# Altium PCB MOTHERBOARD.PcbDoc (part 2 of 3)
Units mil, origin at the board's own origin, x right, y up, seen from the top; angles counter-clockwise.
Board outline 7367.75 x 3037.04 mil, 4 copper layers (Top Layer, Top, Mid-Layer 1, Mid-Layer 2, Bottom Layer, Bottom), stack 18.2 mil thick; 247 components, 239 nets, 1097 pads, 323 vias.
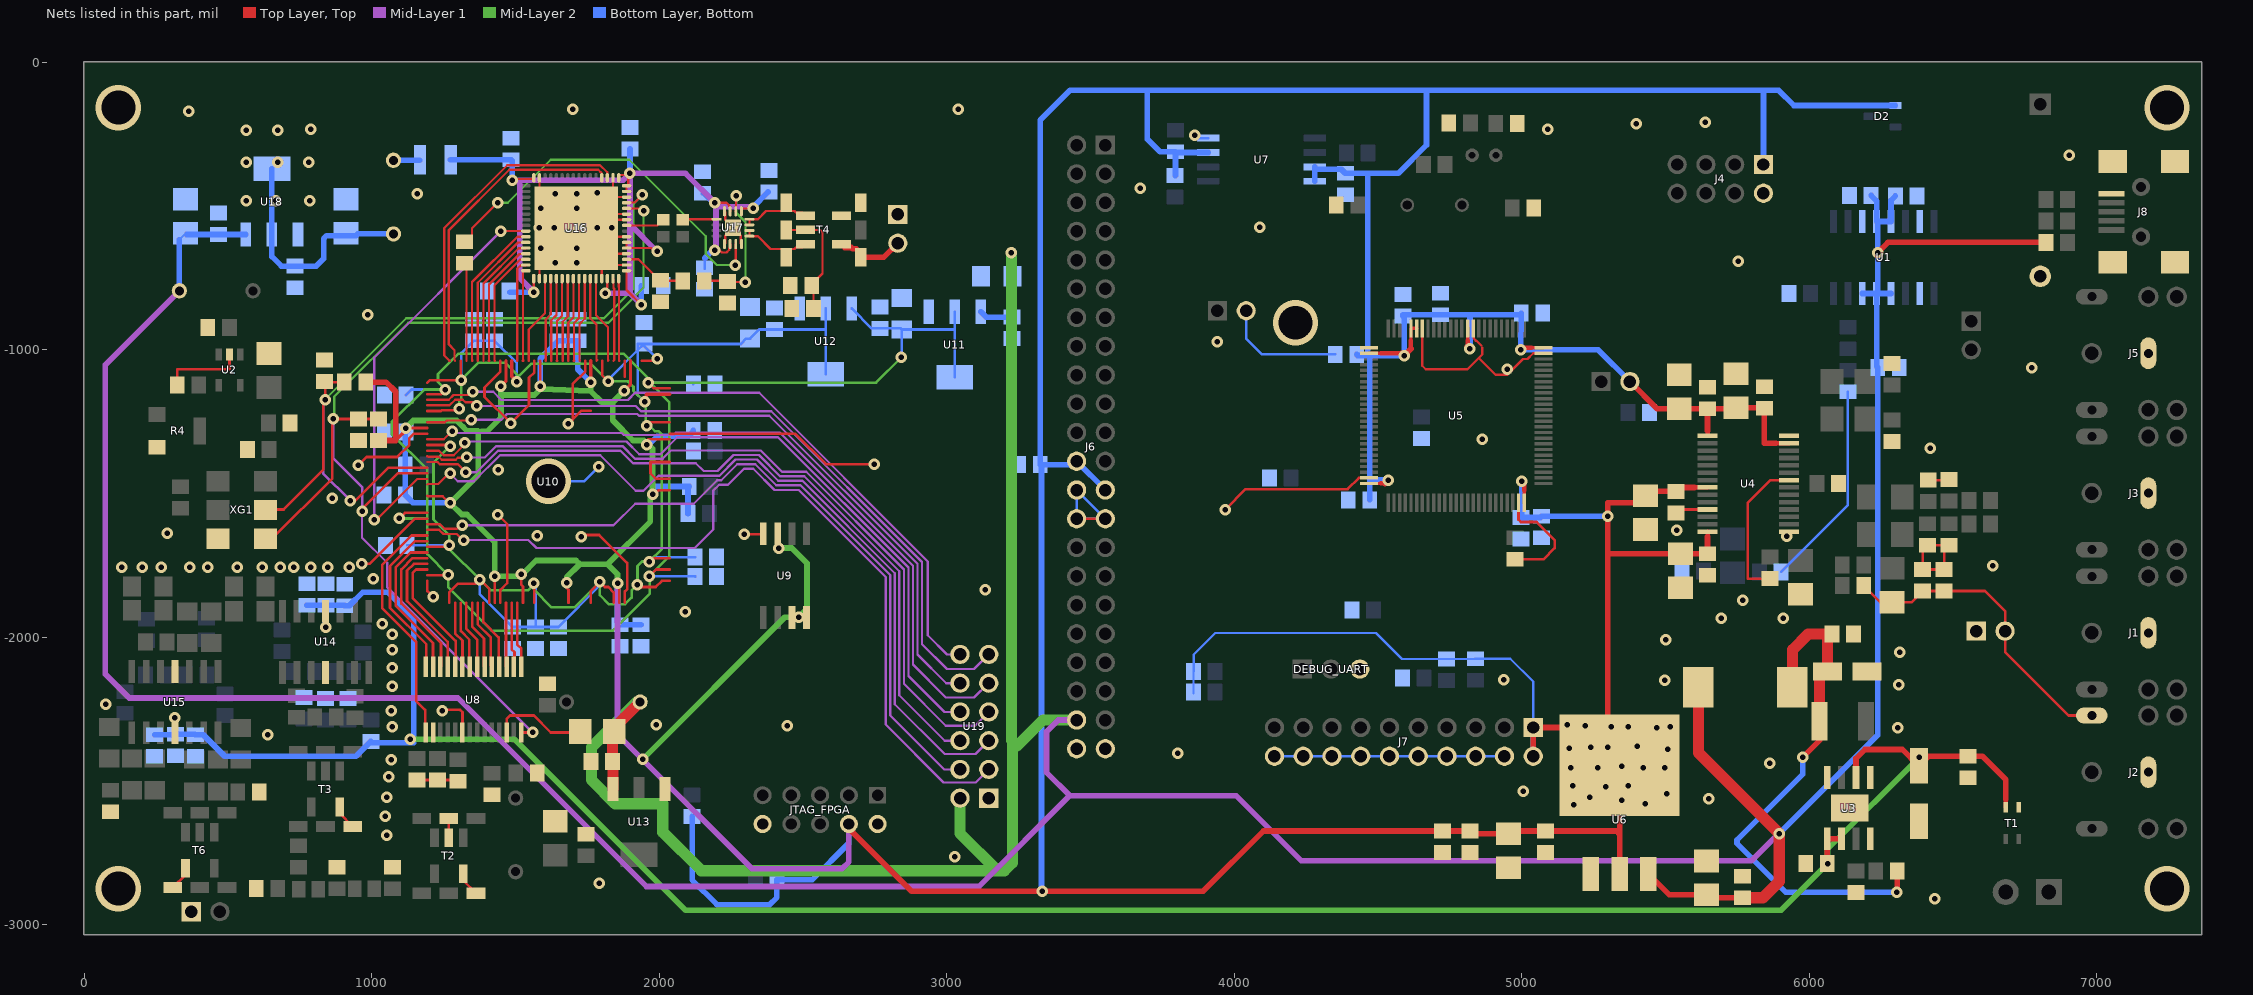
[diagram p4: the nets of this part, all layers, seen from the top]

## Part data
13.8V: library part JX2, "JX2"
B1: library part BR1632A/FA, "BR1632A/FA"
BOOT0 MIС_IN2 PTT_IN SPEAKER: library part 51022-0200, "51022-0200"
C1: library part CAPAE_6.6x6.6h5.4, "CAPAE_6.6x6.6h5.4"
C2 C8 C18 C20 C22 C24 C25 C26 C29 C32 C33 C34 C35 C54 C60: library part CAPAE_4.3x4.3h5.4, "CAPAE_4.3x4.3h5.4"
C3 C4 C5 C6 C7 C9 C10 C11 C12 C13 C14 C15 C16 C17 C19 C21 C23 C27 C28 C30 C31 C36 C37 C38 C39 C40 C41 C42 C43 C44 C45 C46 C47 C48 C49 C50 C51 C52 C53 C55 C56 C57 C58 C59 C61 C62 C63 C65 C67 C69 C70 C71 C72 C73 C74 C75 C76 C77 C78 C79 C81 C82 C83 C84 C86 C87 C88 C89 C90 C91 C92 C93 C94 C95 C96 C97 C98 C99 C100 C101 C104 C107 C123: library part CAP_0805, "CAP_0805"
C64 C66 C68: library part C0805, "C0805"
C80 C85: library part EEEFC_sizeB, "EEEFC_sizeB"
C102 C103 C105 C106 C108 C109 C110 C111: library part CAP_1206, "CAP_1206"
C125: library part EEEFC_sizeB
DEBUG_UART: library part 51022-0300, "51022-0300"
J1 J2 J3 J5: library part SJ1-3523N, "SJ1-3523N"
J4: library part 90131-0124, "90131-0124"
J6: library part 90131-0142, "90131-0142"
J7: library part 90131-0130, "90131-0130"
J8: library part 2-1734035-3, "2-1734035-3"
J9 J10: library part 644456-2, "644456-2"
JTAG_FPGA: library part IDC10, "IDC10"
L1: library part IND_1812, "IND_1812"
L2 L4: library part IND_0805, "IND_0805"
L3 L5 L6: library part IND_FERRITE_BEAD, "Ferrite bead on conductor"
L8: "Ferrite bead on conductor"
L37: library part IND_FERRITE_CORE, "Inductor"
R1 R2 R3 R5 R6 R7 R8 R9 R10 R11 R12 R13 R14 R15 R16 R17 R18 R19 R20 R21 R22 R23 R24 R25 R26 R27 R28 R29 R30 R31 R32 R33 R34 R35 R36 R37 R38 R39 R40 R41 R42 R43 R47 R48 R49 R50 R51 R53 R54 R56 R57 R58 R59 R60 R61 R64 R65: library part RES_0805, "RES_0805"
R4: library part EVM1DSX30B, "EVM1DSX30B"
R52 R55 R62 R63: library part RES_1206, "RES_1206"
T1: library part TRANSF_ICORE, "Transformer"
T2 T3: library part TRANSF_ACORE2, "Transformer"
T4: "Transformer"
T6: library part TRANSF_ACORE, "Transformer"
U11 U12: library part AMS1117, "AMS1117"
U13 U18: library part LT1117CST-3.3, "LT1117CST-3.3"
U17: library part CMP-0359-03855-2, "Single Channel, Low Noise, Low Distortion Differential ADC Driver for 300 MHz IF, 1800 MHz Typical GBW, 4500 V/us Typical SR, 2.85 to 3.5 V, 16-Pin QFN (UD-16), Industrial, Pb-Free", Linear Technology Part Number=LTC6400-20, Manufacturer="Linear Technology", Channels (#)=1, Code_JEDEC=MO-220, ComponentLink1Description="Manufacturer URL", ComponentLink1URL=http://www.linear.com/, ComponentLink2Description=Datasheet, ComponentLink2URL=http://cds.linear.com/docs/en/datasheet/640020f.pdf, ComponentLink3Description="Package Specification", ComponentLink3URL=http://cds.linear.com/docs/en/packaging/QFN_16_05-08-1691.pdf, GBW (MHz) Typical=1800, Is (mA) Typical=90, Mounting Technology="Surface Mount", PackageDescription="16-Lead Plastic QFN, Body 3.00 x 3.00 mm, Pitch 0.5 mm", PackageReference=LT-UD-16, PartNumber=LTC6400IUD-20#PBF, RevisionNote="URLs updated", RoHS=Pb-Free, SR (V/us) Typical=4500, Type=DIFF, Vos (mV) Typical=2, Vs Max (V)=3.5, Vs Min (V)=2.85
U19: "90131-0130"
XG1: library part NV7050SA, "NV7050SA"
Y1: library part R26-32.768, "R26-32.768"
Y2: library part ECS-200-20-1, "ECS-200-20-1"

## Via types
v1: diameter 40, hole 19.12, Top Layer, Top to Bottom Layer, Bottom, tented both sides, 262 vias
v2: diameter 40, hole 19.13, Top Layer, Top to Bottom Layer, Bottom, tented both sides, 51 vias
v3: diameter 157.48, hole 118.11, Top Layer, Top to Bottom Layer, Bottom, 6 vias
v4: diameter 40, hole 19.12, Top Layer, Top to Bottom Layer, Bottom, 3 vias
v5: diameter 19.68, hole 7.87, Top Layer, Top to Bottom Layer, Bottom, tented both sides, 1 vias

## Nets (pads, with @x,y where several pads share a name; then routed paths per layer and width w, separated by ;. In a path a pad name is that pad's centre, name@x,y a point inside that pad or via, vN(x,y) a via of type N, cw(c..) or ccw(c..) an arc to the next point about the centre after c; other vN are vias at no path point)
5V: C2.1 C6.2 L1.2 L37.2 R2.2 | length 1857.3
  Top Layer, Top w19.68: v1(5976.38,-2417.32) 6035.43,-2358.27 L1.2@6035.43,-2291.34 ; C2.1@6035.43,-2145.67 C2.1@6062.99,-2118.11 ; C6.2@6062.99,-2003.94 C6.2@6078.74,-1988.19 ; v1(6303.58,-2886.63) 6305.49,-2884.72 R2.2@6305.49,-2812.04
  Top Layer, Top w39.37: L37.2@5940.94,-2173.23 5940.94,-2043.31 5996.06,-1988.19 C6.2@6078.74,-1988.19 ; L1.2@6035.43,-2291.34 C2.1@6035.43,-2145.67 ; C2.1@6062.99,-2118.11 C6.2@6062.99,-2003.94
  Bottom Layer, Bottom w19.68: v1(5976.38,-2417.32) 5976.38,-2476.38 5748.03,-2704.72 5748.03,-2716.54 5917.32,-2885.83 6302.78,-2885.83 v1(6303.58,-2886.63)
+1V2: C62.1 C68.1 C69.1 C72.1 C74.1 C82.1 C87.1 C91.1 C95.1 C98.1 U10.1 U10.5 U10.29 U10.34 U10.37 U10.38 U10.45 U10.61 U10.70 U10.73 U10.78 U10.84 U10.102 U10.109 U10.116 U10.124 U10.134 U10.138 U12.2 U12.4 | length 7334.4
  Top Layer, Top w9.06: U10.102@1192.91,-1685.04 1263.75,-1685.04 v1(1268.65,-1680.14) ; U10.84@1192.91,-1330.71 1267.72,-1330.71 v1(1271.65,-1334.64) ; U10.78@1192.91,-1212.6 1239.91,-1212.6 1243.25,-1209.25 1298.62,-1209.25 v1(1303.15,-1204.72) ; U10.73@1192.91,-1114.17 1201.7,-1105.39 1310.74,-1105.39 v1(1311.32,-1105.97) 1309.06,-1103.71 U10.70@1309.06,-1037.4 ; U10.109@1269.69,-1879.92 1269.69,-1842.27 1297.91,-1814.04 1360.19,-1814.04 v1(1375.57,-1798.67) 1407.48,-1830.58 U10.116@1407.48,-1879.92 ; v1(1562.99,-1811.02) 1564.96,-1812.99 U10.124@1564.96,-1879.92 ; U10.134@1761.81,-1879.92 1761.81,-1837.85 v1(1792.49,-1807.18) 1810.01,-1824.69 1822.18,-1824.69 1840.55,-1843.07 U10.138@1840.55,-1879.92 ; U10.45@1801.18,-1037.4 1801.18,-1088.33 v1(1821.47,-1108.62) ; v1(1923.74,-1816.34) 1932.09,-1824.69 1987.19,-1824.69 2008.73,-1803.15 U10.1@2035.43,-1803.15 ; U10.38@1938.98,-1037.4 1986.22,-1037.4 v1(1992.13,-1031.5) ; v1(1956.69,-1263.78) 1956.69,-1257.27 1961.99,-1251.97 U10.29@2035.43,-1251.97 ; v1(1964.57,-1736.22) 1976.38,-1724.41 U10.5@2035.43,-1724.41
  Top Layer, Top w11.81: U10.61@1486.22,-1037.4 1486.22,-1092.52 v1(1503.94,-1110.24) ; v1(1948.82,-1181.1) 1954.21,-1175.71 1954.21,-1155.07 1955.73,-1153.54 U10.34@2035.43,-1153.54
  Mid-Layer 2 w9.06: v1(1271.65,-1334.64) 1214.1,-1392.19 1214.1,-1589.91 1268.65,-1644.46 v1(1268.65,-1680.14) 1268.65,-1691.75 v1(1375.57,-1798.67) 1413.54,-1836.65 1542.16,-1836.65 v1@1562.99,-1815.81 ; v1(1303.15,-1204.72) 1303.15,-1176.4 1311.32,-1168.22 v1(1311.32,-1105.97) 1311.32,-1103.46 1369.84,-1044.94 1464.45,-1044.94 1505.42,-1085.9 v1@1505.42,-1097.25 ; v1(1503.94,-1110.24) 1505.42,-1108.76 v1@1505.42,-1097.25 ; v1(1562.99,-1811.02) v1@1562.99,-1815.81 ; v1@1505.42,-1097.25 1553.97,-1048.7 1761.55,-1048.7 v1(1821.47,-1108.62) 1888.15,-1108.62 1889.23,-1109.7 1891,-1109.7 1909.98,-1128.68 1909.98,-1142.27 1952.75,-1185.04 1952.75,-1259.84 v1(1956.69,-1263.78) 1965.06,-1263.78 1983.79,-1282.5 1996.26,-1282.5 2008.46,-1294.7 2008.46,-1692.32 v1(1964.57,-1736.22) 1964.26,-1735.91 1939.4,-1735.91 1923.74,-1751.57 v1(1923.74,-1816.34) 1903.16,-1836.93 1903.16,-1861.56 1880.7,-1884.02 1823.68,-1884.02 1792.49,-1852.83 v1(1792.49,-1807.18) 1704.16,-1895.5 1625.37,-1895.5 1562.99,-1833.13 v1@1562.99,-1815.81
  Bottom Layer, Bottom w9.06: C87.1@1122.22,-1680.09 1268.6,-1680.09 v1(1268.65,-1680.14) ; v1(1311.32,-1105.97) 1311.32,-1010.62 C82.1@1353.48,-968.46 C74.1@1426.82,-968.46 1503.94,-1045.57 v1(1503.94,-1110.24) ; v1(1375.57,-1798.67) 1375.57,-1850.06 C91.1@1489.42,-1963.92 C95.1@1569.56,-1963.92 ; v1(1562.99,-1811.02) 1569.56,-1817.59 C95.1@1569.56,-1963.92 ; v1(1792.49,-1807.18) 1792.49,-1819.85 C98.1@1648.42,-1963.92 C95.1@1569.56,-1963.92 ; v1(1821.47,-1108.62) 1821.47,-1104.32 C72.1@1924.65,-1001.13 ; v1(1948.82,-1181.1) 1924.65,-1156.94 C72.1@1924.65,-1001.13 ; v1(1964.57,-1736.22) 1979.73,-1721.06 C62.1@2124.05,-1721.06 ; v1(1992.13,-1031.5) 1982.37,-1021.74 C72.1@1943.21,-982.58 ; U12.4@2578.74,-1084.44 2578.74,-929.11 ; U12.2@2578.74,-856.1 2578.74,-929.11 ; C72.1@1924.65,-1001.13 C72.1@1943.21,-982.58 ; C72.1@1924.65,-1001.13 1924.65,-979.6 1940.23,-979.6 C72.1@1943.21,-982.58 ; C72.1@1943.21,-982.58 C72.1@1946.19,-979.6 2283.06,-979.6 2302.03,-960.63 C68.1@2314.96,-960.63 2346.48,-929.11 C69.1@2400.72,-929.11 2578.74,-929.11
+2V5: C61.1 C66.1 C67.1 C73.1 C84.1 U10.3 U10.35 U10.75 U10.96 U10.107 U11.2 U11.4 U12.3 | length 5983.5
  Top Layer, Top w9.06: v1(1095.71,-1586.39) 1115.17,-1566.93 U10.96@1192.91,-1566.93 ; U10.107@1192.91,-1783.46 1264.14,-1783.46 v1(1264.96,-1782.65) ; U10.75@1192.91,-1153.54 1240.15,-1153.54 v1(1255.9,-1137.79) ; v1(1960.63,-1114.17) 1980.32,-1133.86 U10.35@2035.43,-1133.86 ; v1(1964.57,-1787.4) 1988.19,-1763.78 U10.3@2035.43,-1763.78
  Mid-Layer 2 w9.06: v1(1095.71,-1586.39) 1192.69,-1586.39 ; v1(2841.21,-1026.21) 2753.24,-1114.17 v1(1960.63,-1114.17) ; 1192.69,-1586.39 1192.69,-1415.99 1068.78,-1292.08 1068.78,-1251.22 1182.2,-1137.79 v1(1255.9,-1137.79) 1229.81,-1111.7 1229.81,-1084.4 1301.21,-1013 1875.27,-1013 1960.63,-1098.36 v1(1960.63,-1114.17) ; 1192.69,-1586.39 1192.69,-1710.38 v1(1264.96,-1782.65) 1264.96,-1824.98 1416.88,-1976.9 1836.71,-1976.9 1966.66,-1846.95 1966.66,-1789.5 v1(1964.57,-1787.4) 2033.78,-1718.19 2033.78,-1181.5 1966.45,-1114.17 v1(1960.63,-1114.17)
  Bottom Layer, Bottom w9.06: C84.1@1118.42,-1156.91 1120.82,-1154.5 1137.53,-1137.79 v1(1255.9,-1137.79) ; v1(1960.63,-1114.17) 2113.28,-1114.17 C73.1@2118.28,-1119.17 ; v1(1964.57,-1787.4) 2123.46,-1787.4 C61.1@2124.05,-1787.98 ; U12.3@2669.29,-856.1 2738.37,-925.18 2838.56,-925.18 C66.1@2842.52,-929.13 ; v1(2841.21,-1026.21) 2842.52,-1024.9 C66.1@2842.52,-929.13 ; U11.4@3027.56,-1095.58 3027.56,-929.13 ; U11.2@3027.56,-867.23 3027.56,-929.13 ; C66.1@2842.52,-929.13 3027.56,-929.13
+3V3: BOOT0.2 C17.1 C18.1 C19.1 C20.1 C21.2 C22.1 C23.2 C24.1 C44.2 C45.2 C46.2 C47.2 C48.2 C49.2 C50.2 C51.1 C52.1 C54.1 C56.2 C58.1 C59.2 C70.1 C76.1 C79.1 C86.1 C88.1 C94.1 C99.1 D2.1 J4.1 J6.24 J6.25 J7.1 J7.2 JTAG_FPGA.4 R20.1 R21.1 R24.1 R30.2 R31.2 R32.2 R33.2 R34.1 R35.1 R36.1 R37.1 R39.1 R47.2 U4.1 U4.8 U4.14 U4.27 U5.11 U5.20 U5.21 U5.27 U5.50 U5.75 U5.100 U6.2 U6.4 U7.3 U7.7 U7.8 U9.3 U9.7 U9.8 U10.17 U10.26 U10.40 U10.47 U10.56 U10.62 U10.81 U10.93 U10.117 U10.122 U10.130 U10.139 | length 28722.7
  Top Layer, Top w9.06: v1@1125.98,-1271.65 U10.81@1192.91,-1271.65 ; U10.93@1192.91,-1507.87 1193.98,-1508.94 1194.29,-1509.25 1246.4,-1509.25 1268.65,-1531.5 v1(1271.65,-1531.5) ; U10.117@1427.17,-1879.92 1427.62,-1879.47 v1(1427.62,-1787.66) ; v1(1519.21,-1780.65) 1519.21,-1816.69 1525.59,-1823.06 U10.122@1525.59,-1879.92 ; U10.56@1584.65,-1037.4 1585.28,-1038.04 v1(1585.28,-1126.26) ; v1(1677.37,-1809.18) 1677.37,-1827.7 1683.88,-1834.2 1683.88,-1879.11 U10.130@1683.07,-1879.92 ; v1(1854.33,-1811.02) 1854.33,-1822.83 1860.24,-1828.74 U10.139@1860.24,-1879.92 ; v1(1956.69,-1330.71) 1961.99,-1325.4 1961.99,-1311.02 U10.26@2035.43,-1311.02 ; v1(1976.06,-1502.91) 1981.8,-1502.91 1996.52,-1488.19 U10.17@2035.43,-1488.19 ; U9.3@2411.44,-1639.27 2414.41,-1642.24 v1(2414.41,-1689.06)
  Top Layer, Top w11.81: 1082.68,-1314.96 1122.05,-1275.59 v1@1125.98,-1271.65 ; v1(1447.35,-1126.08) 1466.54,-1106.9 U10.62@1466.54,-1037.4 ; v1(1760.75,-1111.75) 1761.81,-1110.69 U10.47@1761.81,-1037.4 ; v1(1877.58,-1142.1) 1899.61,-1120.08 U10.40@1899.61,-1037.4 ; U5.50@4468.5,-1464.57 4509.84,-1464.57 ; U5.27@4468.5,-1011.81 4509.84,-1011.81 ; 4614.17,-966.54 U5.21@4614.17,-925.2 U5.20@4633.86,-925.2 ; 4811.02,-966.54 U5.11@4811.02,-925.2 ; U5.75@5007.87,-1531.5 5007.87,-1490.16 ; 5033.46,-992.13 U5.100@5074.8,-992.13
  Top Layer, Top w15.75: 4509.84,-1464.57 v1@4523.62,-1464.57 ; 4509.84,-1011.81 v1@4582.68,-1011.81 ; 4614.17,-996.06 4614.17,-966.54 ; v1@4811.02,-987.49 4811.02,-966.54 ; v1@5003.94,-992.13 5033.46,-992.13 ; 5007.87,-1490.16 v1@5007.87,-1464.57 ; 5600.39,-1478.35 U4.8@5645.67,-1478.35 ; 5645.67,-1649.61 U4.14@5645.67,-1631.89 ; U4.1@5645.67,-1299.21 5645.67,-1281.5 ; 5883.86,-1324.8 U4.27@5929.13,-1324.8
  Top Layer, Top w19.68: R20.1@978.35,-1112.2 1049.21,-1112.2 1082.68,-1145.67 1082.68,-1314.96 R21.1@1023.62,-1314.96 ; U9.7@2461.44,-1930.61 v1@2484.04,-1930.61 ; JTAG_FPGA.4@2659.01,-2649 2642.93,-2649 2877.07,-2883.15 v1(3331.97,-2883.15) 3891.19,-2883.15 4101.11,-2673.23 C45.2@4724.48,-2673.23 ; v1@4523.62,-1464.57 v1(4535.43,-1452.76) ; v1@4582.68,-1011.81 v1(4590.55,-1019.69) 4614.17,-996.06 ; C45.2@4724.48,-2673.11 C45.2@4724.48,-2673.23 ; v1@4811.02,-987.49 v1(4819.36,-995.83) ; v1(4996.06,-1000) v1@5003.94,-992.13 ; v1(5000,-1456.69) v1@5007.87,-1464.57 ; J7.2@5039.37,-2413.39 J7.1@5039.37,-2313.39 5208.66,-2313.39 5211.42,-2316.14 5258.66,-2363.39 U6.4@5298.85,-2403.57 ; v1(5299.21,-2381.89) U6.4@5298.85,-2381.89 ; U6.2@5340.16,-2822.83 5340.16,-2684.82 ; v1(5346.46,-2566.93) U6.4@5340.16,-2566.93 ; v1(5346.46,-2448.82) 5344.09,-2448.82 U6.4@5340.16,-2444.88 ; BOOT0.2@5375.59,-1110.24 5470.08,-1204.72 C18.1@5547.24,-1204.72 C17.1@5645.67,-1204.72 ; 5600.39,-1478.35 5549.21,-1478.35 C23.2@5535.43,-1492.13 5444.88,-1492.13 5433.07,-1503.94 5430.16,-1506.85 5405.51,-1531.5 5298.85,-1531.5 v1(5298.85,-1578.95) 5298.85,-1708.66 ; 5645.67,-1649.61 C21.2@5645.67,-1708.66 C22.1@5551.18,-1708.66 5298.85,-1708.66 ; 5645.67,-1281.5 C17.1@5645.67,-1204.72 ; 5883.86,-1324.8 5855.35,-1324.8 5854.85,-1324.3 5842.52,-1324.3 5842.52,-1204.72 C19.1@5844.49,-1202.76 5842.52,-1200.79 C20.1@5744.09,-1200.79 5740.16,-1204.72 C17.1@5645.67,-1204.72 ; v1@2484.04,-1930.61 U9.8@2511.44,-1930.61 2510.64,-1929.82 v1(2484.04,-1929.82) v1@2484.04,-1930.61 ; C45.2@4724.48,-2673.23 C44.2@4818.9,-2673.23 4818.9,-2683.07 C54.1@4952.76,-2683.07 4952.76,-2673.23 C56.2@5082.68,-2673.23 5328.57,-2673.23 5340.16,-2684.82 ; U6.4@5298.85,-2403.57 U6.4@5298.85,-2381.89 ; U6.4@5298.85,-2403.57 U6.4@5340.16,-2444.88 ; U6.4@5298.85,-2381.89 5298.85,-1708.66 ; 5340.16,-2684.82 U6.4@5340.16,-2566.93 ; U6.4@5340.16,-2566.93 U6.4@5340.16,-2444.88
  Mid-Layer 1 w19.68: v1(1854.33,-1811.02) 1854.33,-2337.32 v1(1941.3,-2424.28) 2321.67,-2804.65 2635.28,-2804.65 2659.01,-2780.92 JTAG_FPGA.4@2659.01,-2649
  Mid-Layer 2 w19.68: v1(1118.11,-1271.65) 1144.01,-1245.75 1295.15,-1245.75 1317.24,-1267.84 1317.24,-1268.22 1330.83,-1281.81 1368.43,-1281.81 1370.08,-1283.46 1370.08,-1435.23 v1@1273.81,-1531.5 ; v1(1271.65,-1531.5) v1@1273.81,-1531.5 ; 1381.29,-1283.46 1400.75,-1283.46 1449.2,-1235.02 1449.2,-1157.04 ; v1(1447.35,-1126.08) 1449.2,-1127.93 1449.2,-1157.04 ; v1(1585.28,-1126.26) 1586.09,-1127.08 v1@1586.09,-1135.9 ; v1(1677.37,-1809.18) 1677.37,-1790.76 1722.72,-1745.41 ; v1(1760.75,-1111.75) 1760.75,-1142.91 ; v1(1854.33,-1811.02) 1854.33,-1780.08 1819.66,-1745.41 ; v1(1877.58,-1142.1) 1837.87,-1181.82 ; v1(1941.3,-2424.28) 2435.77,-1929.82 v1(2484.04,-1929.82) 2513.54,-1900.31 2513.54,-1742.17 2460.43,-1689.06 v1(2414.41,-1689.06) ; v1(1956.69,-1330.71) 1956.69,-1326.54 1945.16,-1315.01 1908.11,-1315.01 1837.87,-1244.76 1837.87,-1181.82 ; v1@1956.69,-1324.39 1976.06,-1343.77 1976.06,-1495.34 1968.5,-1502.91 1968.5,-1596.57 1819.66,-1745.41 ; v1@1273.81,-1531.5 1273.81,-1533.65 1312.68,-1572.52 1330.58,-1572.52 1427.62,-1669.55 v1(1427.62,-1787.66) 1512.2,-1787.66 v1(1519.21,-1780.65) 1523.17,-1780.65 1571.11,-1732.71 1710.02,-1732.71 1722.72,-1745.41 ; 1449.2,-1157.04 1564.96,-1157.04 v1@1586.09,-1135.9 ; v1@1586.09,-1135.9 1760.75,-1142.91 ; 1722.72,-1745.41 1819.66,-1745.41 ; 1760.75,-1142.91 1799.66,-1181.82 1837.87,-1181.82
  Bottom Layer, Bottom w7.87: R33.2@3857.76,-2194.57 R33.2@3857.76,-2190.63 R37.1@3857.76,-2118.7 3858.27,-2118.19 3858.27,-2059.06 3933.07,-1984.25 4492.13,-1984.25 4582.94,-2075.06 R36.1@4738.38,-2075.06 4836.71,-2075.06 R35.1@4837.89,-2073.88 4959.71,-2073.88 5039.37,-2153.54 J7.1@5039.37,-2313.39
  Bottom Layer, Bottom w19.68: R24.1@1116.14,-1399.61 1116.14,-1272.25 C86.1@1121.09,-1272.25 ; v1(1118.11,-1271.65) 1120.49,-1271.65 C86.1@1121.09,-1272.25 ; v1(1271.65,-1531.5) 1142.53,-1531.5 C88.1@1116.52,-1505.48 1116.52,-1285.33 C86.1@1118.42,-1285.33 1121.09,-1282.66 C86.1@1121.09,-1272.25 ; v1(1585.28,-1126.26) 1585.28,-1030.87 C79.1@1647.69,-968.46 C76.1@1716.01,-968.46 1716.01,-1067 v1(1760.75,-1111.75) ; v1(1854.33,-1811.02) 1854.33,-1947.23 C94.1@1862.65,-1955.56 C99.1@1936.11,-1955.56 ; v1(1956.69,-1330.71) 1962.19,-1330.71 1992.97,-1299.92 2101.82,-1299.92 2117.57,-1284.17 C70.1@2117.57,-1280.24 ; v1(1976.06,-1502.91) 1979.95,-1499.02 1979.95,-1482.66 1987.59,-1475.02 R47.2@2103.31,-1475.02 2099.37,-1478.96 R30.2@2099.37,-1569.51 ; R32.2@2113.74,-2622.81 2113.74,-2843.46 2199.79,-2929.51 2383.58,-2929.51 2408.71,-2904.38 2408.71,-2843.79 R31.2@2409.24,-2843.27 2531.08,-2843.27 2658.47,-2715.88 2658.47,-2649.55 JTAG_FPGA.4@2659.01,-2649 ; v1(3331.97,-2883.15) 3329.29,-2880.47 C58.1@3329.29,-1398.96 ; J6.25@3551.18,-1487.4 J6.24@3451.18,-1387.4 3439.62,-1398.96 C58.1@3329.29,-1398.96 ; R39.1@3794,-393.2 3795.08,-392.11 R34.1@3795.08,-310.83 ; U7.3@3909.45,-313.39 3797.64,-313.39 R34.1@3795.08,-310.83 ; U7.8@4279.53,-413.39 U7.7@4279.53,-371.58 ; U7.7@4279.53,-363.39 U7.7@4279.53,-371.58 ; C49.2@4425.2,-1015.75 4429.13,-1019.69 4463.98,-1019.69 ; C46.2@4470.51,-1521.52 4470.51,-1452.76 ; v1(4535.43,-1452.76) 4470.51,-1452.76 ; v1(4819.36,-995.83) 4819.36,-877.95 ; C50.2@4998.03,-872.05 4998.03,-877.95 C50.2@4997.94,-877.95 ; v1(5000,-1456.69) 5000,-1578.74 C48.2@4996.06,-1582.68 5064.33,-1582.68 5068.06,-1578.95 v1(5298.85,-1578.95) ; J7.2@5039.37,-2413.39 J7.1@5039.37,-2313.39 ; BOOT0.2@5375.59,-1110.24 5265.35,-1000 v1(4996.06,-1000) C50.2@4997.94,-877.95 ; J4.1@5840.16,-355.12 5840.16,-96.67 ; D2.1@6299.21,-149.61 5945.94,-149.61 5893.01,-96.67 5840.16,-96.67 ; C58.1@3329.29,-1398.96 C58.1@3324.67,-1398.96 3324.67,-200.61 3428.61,-96.67 3697.44,-96.67 ; 3697.44,-96.67 4668.36,-96.67 ; 3697.44,-96.67 3697.44,-267 3741.27,-310.83 R34.1@3795.08,-310.83 ; U7.7@4279.53,-371.58 4371.58,-371.58 C59.2@4385.63,-385.63 4463.98,-385.63 ; 4463.98,-1019.69 4463.98,-385.63 ; 4463.98,-1019.69 4470.41,-1019.69 ; 4463.98,-385.63 4570.33,-385.63 4668.36,-287.6 4668.36,-96.67 ; 4470.41,-1019.69 4470.51,-1448.82 4470.41,-1448.82 4470.41,-1452.76 4470.51,-1452.76 ; 4470.41,-1019.69 v1(4590.55,-1019.69) 4590.55,-885.83 C52.1@4586.61,-881.89 4586.61,-877.95 C51.1@4716.54,-877.95 4819.36,-877.95 ; 4668.36,-96.67 5840.16,-96.67 ; 4819.36,-877.95 C50.2@4997.94,-877.95
  other v1: 5181.1,-2582.68 5429.13,-2578.74 5236.22,-2555.12 5503.94,-2543.31 5291.34,-2519.69 5177.17,-2515.75 5370.08,-2515.75 5169.29,-2452.76 5263.78,-2452.76 5421.26,-2452.76 5496.06,-2452.76 5507.87,-2389.76 5165.35,-2385.83 5240.16,-2381.89 5401.57,-2377.95 5468.5,-2314.96 5311.02,-2311.02 5370.08,-2311.02 5515.75,-2311.02 5220.47,-2307.09 5157.48,-2303.15
+5: C14.1 C15.1 C16.1 C53.2 C60.1 C64.1 C65.1 C80.1 C81.2 C123.2 C125.1 J6.42 L3.1 L6.2 L37.1 R41.1 U1.4 U1.5 U1.6 U1.12 U1.13 U6.3 U11.3 U13.3 U18.3 U19.2 | length 18530.4
  Top Layer, Top w19.68: U6.3@5440.16,-2822.83 5512.99,-2895.67 C60.1@5641.73,-2895.67 5651.57,-2905.51 C53.2@5767.72,-2905.51 ; v1(6237.44,-662.09) 6273.56,-625.98 R41.1@6822.83,-625.98
  Top Layer, Top w37.4: U13.3@1838.58,-2527.56 1838.58,-2465.55
  Top Layer, Top w39.37: 1838.58,-2465.55 1838.58,-2433.07 C81.2@1836.61,-2431.1 1836.61,-2332.68 C80.1@1842.52,-2326.77 1842.52,-2314.96 L6.2@1933.07,-2224.41 ; L37.1@5614.17,-2173.23 5614.17,-2401.43 v1(5895.17,-2682.43) 5895.17,-2848.92 5838.58,-2905.51 C53.2@5767.72,-2905.51
  Mid-Layer 1 w19.68: L3.1@330.18,-794.31 73.04,-1051.45 73.04,-2128.15 155.71,-2210.83 1299.02,-2210.83 1954.6,-2866.41 3111.38,-2866.41 3427.39,-2550.4 ; J6.42@3451.18,-2287.4 3387.33,-2287.4 3346.53,-2328.2 3346.53,-2469.55 3427.39,-2550.4 ; v1(5895.17,-2682.43) 5895.17,-2679.82 5893.87,-2681.12 5797.61,-2777.38 4232.91,-2777.38 4005.93,-2550.4 3427.39,-2550.4
  Mid-Layer 2 w39.37: L6.2@1933.07,-2224.41 1921.26,-2224.41 1763.78,-2381.89 1763.78,-2496.06 1846.46,-2578.74 2011.81,-2578.74 2011.81,-2677.17 2145.98,-2811.34 3174.87,-2811.34 ; U19.2@3045.67,-2559.06 3045.67,-2682.14 3174.87,-2811.34 ; v2(3224.41,-661.42) 3224.41,-2358.27 3228.35,-2362.2 3228.35,-2377.95 3228.35,-2783.46 3200.47,-2811.34 3174.87,-2811.34 ; 3244.09,-2377.95 3334.65,-2287.4 J6.42@3451.18,-2287.4
  Bottom Layer, Bottom w7.87: C125.1@330.18,-616.52 C125.1@352.2,-594.49 C125.1@356.14,-598.43 ; C64.1@3224.41,-743.99 C64.1@3226.43,-746.01
  Bottom Layer, Bottom w19.68: L3.1@330.18,-794.31 C125.1@330.18,-616.52 ; C125.1@356.14,-598.43 C123.2@466.38,-598.43 U18.3@561.47,-598.43 ; U11.3@3118.11,-867.23 3136.72,-885.85 3226.43,-885.85 C64.1@3226.43,-746.01 ; C64.1@3224.41,-743.99 v2(3224.41,-661.42) ; v1(5895.17,-2682.43) 6237.76,-2339.83 C14.1@6237.77,-1061.22 6233.86,-1057.32 U1.5@6233.86,-803.54 ; U1.6@6183.86,-803.54 U1.5@6233.86,-803.54 ; C15.1@6214.57,-462.6 6233.86,-481.89 U1.12@6233.86,-553.54 ; U1.4@6283.86,-803.54 U1.5@6233.86,-803.54 ; C16.1@6299.21,-464.57 6283.86,-479.92 U1.13@6283.86,-553.54 U1.12@6233.86,-553.54 ; U1.5@6233.86,-803.54 6237.44,-799.96 v1(6237.44,-662.09) 6237.44,-557.13 U1.12@6233.86,-553.54
+12: C1.1 C4.2 C5.2 C89.2 C90.2 C92.2 C96.2 C97.2 C100.2 R25.2 T1.3 U3.1 U3.2 U3.6 U14.11 U15.11 | length 8756.6
  Top Layer, Top w9.06: U15.11@314.96,-2331.1 v1(314.96,-2279.53) ; C1.1@6380.58,-2446.93 6381.89,-2445.61 v1(6381.89,-2417.32)
  Top Layer, Top w15.75: T1.3@6683.07,-2590.55 6683.07,-2562.99
  Top Layer, Top w19.68: v1(838.58,-1964.57) 838.98,-1964.17 U14.11@838.98,-1909.45 ; U3.2@6111.85,-2699.77 U3.1@6061.85,-2699.77 C5.2@6061.85,-2787.15 ; U3.6@6161.85,-2487.17 6161.85,-2420.83 6192.91,-2389.76 6323.42,-2389.76 C1.1@6380.58,-2446.93 6414.12,-2413.39 C4.2@6551.18,-2413.39 6602.36,-2413.39 6683.07,-2494.09 6683.07,-2562.99 ; C5.2@6061.85,-2787.15 v1(6062.99,-2787.4) 6061.94,-2787.4 C5.2@6061.77,-2787.23 C5.2@6061.85,-2787.15
  Mid-Layer 2 w19.68: v1(1133.86,-2354.33) 1496.06,-2354.33 2090.55,-2948.82 5901.57,-2948.82 v1(6062.99,-2787.4) 6062.99,-2736.22 v1(6381.89,-2417.32)
  Bottom Layer, Bottom w9.06: v1@1133.86,-2366.14 v1(1133.86,-2354.33)
  Bottom Layer, Bottom w19.68: C92.2@244.09,-2338.58 314.96,-2338.58 C97.2@316.93,-2336.61 ; v1(314.96,-2279.53) 314.96,-2334.65 C97.2@316.93,-2336.61 ; C100.2@773.62,-1887.8 C90.2@840.55,-1887.8 ; v1(838.58,-1964.57) 838.58,-1889.76 C90.2@840.55,-1887.8 ; C97.2@316.93,-2336.61 383.86,-2336.61 C96.2@385.83,-2338.58 413.39,-2338.58 488.19,-2413.39 944.88,-2413.39 R25.2@996.06,-2362.2 1000,-2366.14 1133.86,-2366.14 1145.67,-2366.14 1145.67,-1933.07 1055.12,-1842.52 968.5,-1842.52 921.26,-1889.76 C89.2@905.51,-1889.76 903.54,-1887.8 C90.2@840.55,-1887.8
ADC_RF_C: C116.2 C119.1 T4.2 T4.8 | length 412.1
  Top Layer, Top w7.87: T4.2@2440.94,-582.68 T4.8@2508.27,-582.68 2559.06,-582.68 2566.93,-590.55 2566.93,-734.24 2529.52,-771.65 C119.1@2529.52,-775.59 2535.61,-781.69 C116.2@2535.61,-855.39
ADC_RF_IN: J10.2 T4.4 T4.11 | length 241.8
  Top Layer, Top w7.87: T4.11@2633.46,-632.68 T4.11@2644.49,-643.7 ; T4.4@2685.04,-648.62 2700.79,-664.37 T4.4@2700.79,-677.17
  Top Layer, Top w19.68: T4.11@2644.49,-643.7 2667.32,-643.7 2672.24,-648.62 T4.4@2685.04,-648.62 ; T4.4@2700.79,-677.17 2780.91,-677.17 J10.2@2829.33,-628.74
ADC_RF_N: T4.1 T4.7 U17.15 U17.16 | length 259.2
  Top Layer, Top w7.87: U17.15@2312.99,-564.96 U17.16@2312.99,-545.28 2342.52,-545.28 2371.06,-516.73 2425.2,-516.73 T4.1@2440.94,-500.98 ; T4.1@2440.94,-488.19 T4.1@2440.94,-500.98 ; T4.7@2508.27,-532.68 2497.24,-521.65 2474.41,-521.65 2469.49,-516.73 2456.69,-516.73 T4.1@2440.94,-500.98
ADC_RF_P: T4.3 T4.9 U17.13 U17.14 | length 265.8
  Top Layer, Top w7.87: U17.14@2312.99,-584.65 U17.13@2312.99,-604.33 2342.52,-604.33 2386.81,-648.62 2425.2,-648.62 T4.3@2440.94,-664.37 ; T4.3@2440.94,-677.17 T4.3@2440.94,-664.37 ; T4.9@2508.27,-632.68 2497.24,-643.7 2474.41,-643.7 2469.49,-648.62 2456.69,-648.62 T4.3@2440.94,-664.37
AUDIO_LINE_OUT: C12.2 R18.2 | length 722.2
  Bottom Layer, Bottom w9.06: R18.2@5901.57,-1771.65 6133.86,-1539.37 C12.2@6133.86,-1145.67
CLK_122.88M: R21.2 R22.1 U8.28 U10.89 U16.12 XG1.4 | length 4044.2
  Top Layer, Top w7.87: U16.12@1885.83,-507.87 1928.31,-507.87 1936.19,-515.75 v2(1944.88,-515.75)
  Top Layer, Top w9.06: XG1.4@629.92,-1656.69 653.28,-1656.69 862.2,-1447.77 862.2,-1240.16 v1(866.14,-1240.16) R22.1@952.76,-1240.16 R21.2@1023.62,-1240.16 ; v1(965.72,-1560.62) 957.74,-1560.62 1089.23,-1429.13 U10.89@1192.91,-1429.13 ; U8.28@1519.69,-2330.71 v1(1559.06,-2330.71)
  Mid-Layer 1 w7.87: v1(965.72,-1560.62) 965.72,-1653.34 1052.95,-1740.58 1052.95,-1824.61
  Mid-Layer 1 w9.06: v1(866.14,-1240.16) 866.14,-1377.95 965.72,-1477.53 v1(965.72,-1560.62) ; 1052.95,-1824.61 v1(1559.06,-2330.71)
  Mid-Layer 2 w7.87: v1(866.14,-1240.16) 869.15,-1237.15 869.15,-1162.34 1125.98,-905.51 1822.83,-905.51 1944.88,-783.46 v2(1944.88,-515.75)
CLK_N_122.88M: R20.2 R23.1 U10.88 U16.13 XG1.5 | length 2991.6
  Top Layer, Top w7.87: U16.13@1885.83,-488.19 1886.58,-487.44 1914.14,-487.44 v2(1940.94,-460.63)
  Top Layer, Top w9.06: XG1.5@629.92,-1556.69 629.92,-1555.12 692.91,-1555.12 830.71,-1417.32 830.71,-1180.72 v1(837.34,-1174.09) 837.34,-1112.93 R23.1@836.61,-1112.2 ; R20.2@903.54,-1112.2 R23.1@836.61,-1112.2 ; v1(924.04,-1524.05) 942.39,-1524.05 1056.99,-1409.45 U10.88@1192.91,-1409.45 ; R23.1@836.61,-1112.2 R23.1@834.65,-1110.24 R23.1@836.61,-1112.2
  Mid-Layer 1 w9.06: v1(837.34,-1174.09) 830.71,-1174.09 830.71,-1429.13 924.04,-1522.47 v1(924.04,-1524.05)
  Mid-Layer 2 w7.87: v1(837.34,-1174.09) 837.34,-1171.88 1119.46,-889.76 1807.09,-889.76 1909.45,-787.4 1909.45,-492.13 v2(1940.94,-460.63)
F42: U10.42 U16.64 | length 286.2
  Top Layer, Top w7.87: U16.64@1858.27,-751.97 1858.27,-780.51 1859.25,-781.5 1859.25,-1036.42 U10.42@1860.24,-1037.4
F43: U10.43 U16.63 | length 288.1
  Top Layer, Top w7.87: U16.63@1838.58,-751.97 1840.55,-753.94 1840.55,-785.07 1842.83,-787.35 1842.83,-828.14 1842.52,-828.45 1842.52,-1035.43 U10.43@1840.55,-1037.4
F44: U10.44 U16.60 | length 305.6
  Top Layer, Top w7.87: U16.60@1779.53,-751.97 1779.21,-752.28 1779.21,-879.65 1820.87,-921.3 U10.44@1820.87,-1037.4 1822.83,-1035.43
F46: U10.46 U16.59 | length 297.2
  Top Layer, Top w7.87: U16.59@1759.84,-751.97 1759.84,-889.8 1781.5,-911.46 U10.46@1781.5,-1037.4 1783.46,-1035.43
F49: U10.49 U16.58 | length 293.4
  Top Layer, Top w7.87: U10.49@1722.44,-1037.4 1722.44,-909.49 1740.16,-891.77 U16.58@1740.16,-751.97
  Top Layer, Top w9.06: U10.49@1722.44,-1037.4 1722.87,-1036.97
F50: U10.50 U16.57 | length 293.2
  Top Layer, Top w7.87: U10.50@1702.76,-1037.4 1702.76,-906.9 1720.47,-889.19 U16.57@1720.47,-751.97
  Top Layer, Top w9.06: U10.50@1702.76,-1037.4 1703.06,-1037.1
F51: U10.51 U16.56 | length 293.5
  Top Layer, Top w7.87: U10.51@1683.07,-1037.4 1683.07,-904.32 1700.79,-886.6 U16.56@1700.79,-751.97
  Top Layer, Top w9.06: U10.51@1683.07,-1037.4 1683.59,-1036.89
F52: U10.52 U16.55 | length 294.2
  Top Layer, Top w7.87: U10.52@1663.39,-1037.4 1663.39,-901.73 1681.1,-884.02 U16.55@1681.1,-751.97
  Top Layer, Top w9.06: U10.52@1663.39,-1037.4 1664.37,-1036.42
F53: U10.53 U16.54 | length 292.9
  Top Layer, Top w7.87: U10.53@1643.7,-1037.4 1643.7,-899.15 1661.42,-881.43 U16.54@1661.42,-751.97
  Top Layer, Top w9.06: 1643.59,-1037.3 U10.53@1643.7,-1037.4
F54: U10.54 U16.53 | length 292.9
  Top Layer, Top w7.87: U10.54@1624.02,-1037.4 1624.02,-896.56 1641.73,-878.84 U16.53@1641.73,-751.97
  Top Layer, Top w9.06: U10.54@1624.02,-1037.4 1624.12,-1037.3
F55: U10.55 U16.52 | length 292.8
  Top Layer, Top w7.87: U10.55@1604.33,-1037.4 1604.33,-893.97 1622.05,-876.26 U16.52@1622.05,-751.97
F58: U10.58 U16.51 | length 309.1
  Top Layer, Top w7.87: U10.58@1545.28,-1037.4 1545.28,-929.17 1602.36,-872.09 U16.51@1602.36,-751.97
F59: U10.59 U16.48 | length 322.7
  Top Layer, Top w7.87: U10.59@1525.59,-1037.4 1525.59,-726.23 1527.41,-724.41 U16.48@1535.43,-724.41
  Top Layer, Top w9.06: U10.59@1525.59,-1037.4 1526.27,-1036.72
F60: U10.60 U16.47 | length 354.4
  Top Layer, Top w7.87: U10.60@1505.91,-1037.4 1505.91,-718.06 1518.48,-705.48 1534.68,-705.48 U16.47@1535.43,-704.72
F64: U10.64 U16.46 | length 408.5
  Top Layer, Top w7.87: 1426.8,-1037.04 1426.8,-774.89 1515.9,-685.79 1534.68,-685.79 U16.46@1535.43,-685.04
  Top Layer, Top w9.06: 1426.8,-1037.04 U10.64@1427.17,-1037.4
F65: U10.65 U16.45 | length 437.7
  Top Layer, Top w7.87: 1407.32,-1037.24 1407.32,-772.1 1513.31,-666.11 1534.68,-666.11 U16.45@1535.43,-665.35
  Top Layer, Top w9.06: 1407.32,-1037.24 U10.65@1407.48,-1037.4
F66: U10.66 U16.44 | length 466.9
  Top Layer, Top w7.87: U10.66@1387.8,-1037.4 1387.8,-769.35 1510.73,-646.42 1534.68,-646.42 U16.44@1535.43,-645.67
F67: U10.67 U16.43 | length 496.7
  Top Layer, Top w7.87: U10.67@1368.11,-1037.4 1368.11,-766.77 1508.14,-626.74 1534.68,-626.74 U16.43@1535.43,-625.98
  Top Layer, Top w9.06: U10.67@1368.11,-1037.4 1368.38,-1037.13
F68: U10.68 U16.42 | length 526.3
  Top Layer, Top w7.87: U10.68@1348.43,-1037.4 1348.43,-764.18 1506.31,-606.3 U16.42@1535.43,-606.3
  Top Layer, Top w9.06: U10.68@1348.43,-1037.4 1348.91,-1036.92
F69: R66.2 U10.69 | length 341
  Top Layer, Top w7.87: R66.2@1322.83,-698.82 1328.74,-704.72 U10.69@1328.74,-1037.4
F71: U10.71 U16.20 | length 1103.3
  Top Layer, Top w7.87: U10.71@1289.37,-1037.4 1287.4,-1035.43 1287.4,-1001.01 1267.72,-981.33 1267.72,-582.68 1477.36,-373.03 1786.87,-373.03 1798.46,-384.62 1798.46,-400.82 U16.20@1799.21,-401.57
F72: U10.72 U16.19 | length 1155.6
  Top Layer, Top w7.87: U10.72@1269.69,-1037.4 1251.97,-1019.68 1251.97,-576.15 1470.84,-357.28 1793.39,-357.28 1818.14,-382.04 1818.14,-400.82 U16.19@1818.9,-401.57
F76: U10.76 U19.12 | length 2413.6
  Top Layer, Top w7.87: U10.76@1192.91,-1173.23 1267.38,-1173.23 1283.45,-1157.16 1338.9,-1157.16 v2(1350.39,-1145.67)
  Mid-Layer 1 w7.87: v2(1350.39,-1145.67) 1421.95,-1145.67 1450.2,-1173.91 1890.76,-1173.91 1915.38,-1149.29 2347.47,-1149.29 2933.75,-1735.57 2933.75,-1992.8 3000,-2059.06 U19.12@3045.67,-2059.06
F77: U10.77 U19.11 | length 2538.1
  Top Layer, Top w7.87: U10.77@1192.91,-1192.91 1269.97,-1192.91 1289.97,-1172.91 1316.32,-1172.91 1325.18,-1181.77 1351.06,-1181.77 v2(1364.17,-1194.88)
  Mid-Layer 1 w7.87: v2(1364.17,-1194.88) 1917.61,-1194.88 1935.64,-1212.91 2388.82,-1212.91 2913.39,-1737.48 2913.39,-2023.62 3000,-2110.24 3094.49,-2110.24 U19.11@3145.67,-2059.06
F80: U10.80 U19.10 | length 2437.4
  Top Layer, Top w7.87: U10.80@1192.91,-1251.97 1254.22,-1251.97 1260.8,-1245.39 1343.6,-1245.39 v2(1345.87,-1243.13)
  Mid-Layer 1 w7.87: v2(1345.87,-1243.13) 1449.44,-1243.13 1470,-1222.56 1923.02,-1222.56 1929.12,-1228.66 2382.3,-1228.66 2897.64,-1744 2897.64,-2059.06 2997.64,-2159.06 U19.10@3045.67,-2159.06
F83: U10.83 U19.9 | length 2575.8
  Top Layer, Top w7.87: U10.83@1192.91,-1311.02 1250.28,-1311.02 1277.84,-1283.46 v2(1279.53,-1283.46)
  Mid-Layer 1 w7.87: v2(1279.53,-1283.46) 1284.78,-1288.72 1868.74,-1288.72 1875.61,-1295.59 2048.14,-1295.59 2055.81,-1287.91 2419.28,-1287.91 2881.89,-1750.52 2881.89,-2094.49 2996.06,-2208.66 3094.49,-2208.66 3144.09,-2159.06 U19.9@3145.67,-2159.06
F85: U10.85 U19.8 | length 2541
  Top Layer, Top w7.87: U10.85@1192.91,-1350.39 1233.16,-1350.39 1249.22,-1366.45 1284.83,-1366.45 1322.83,-1328.45 v2(1322.83,-1323.42)
  Mid-Layer 1 w7.87: v2(1322.83,-1323.42) 1327.35,-1318.9 1885.83,-1318.9 1929.45,-1362.52 2003.48,-1362.52 2062.34,-1303.66 2412.75,-1303.66 2866.14,-1757.05 2866.14,-2133.86 2991.34,-2259.06 U19.8@3045.67,-2259.06
F86: U10.86 U19.7 | length 2663.4
  Top Layer, Top w7.87: U10.86@1192.91,-1370.08 1194.88,-1372.05 1232.55,-1372.05 1242.7,-1382.2 1291.35,-1382.2 1298.9,-1374.65 1315.87,-1374.65 1322.52,-1381.31 1322.52,-1382.2 v2(1330.71,-1374.02)
  Mid-Layer 1 w7.87: v2(1330.71,-1374.02) 1392.91,-1374.02 1432.28,-1334.65 1871.35,-1334.65 1914.97,-1378.26 2011.18,-1378.26 2039.36,-1350.08 2352.51,-1350.08 2426.32,-1423.89 2510.72,-1423.89 2850.39,-1763.57 2850.39,-2161.42 2996.06,-2307.09 3097.64,-2307.09 U19.7@3145.67,-2259.06
F87: U10.87 U19.6 | length 2614.7
  Top Layer, Top w7.87: U10.87@1192.91,-1389.76 1227.99,-1389.76 1236.18,-1397.95 1299.53,-1397.95 v2(1326.77,-1425.19)
  Mid-Layer 1 w7.87: v2(1326.77,-1425.19) 1364,-1425.19 1438.8,-1350.39 1864.82,-1350.39 1908.44,-1394.01 2126.3,-1394.01 2153.86,-1421.57 2202.15,-1421.57 2257.9,-1365.82 2345.98,-1365.82 2419.8,-1439.64 2504.19,-1439.64 2834.65,-1770.09 2834.65,-2200.79 2992.91,-2359.06 U19.6@3045.67,-2359.06
F90: U10.90 U16.41 | length 1516.9
  Top Layer, Top w7.87: v2(1007.87,-1590.55) 1015.75,-1590.55 1157.48,-1448.82 U10.90@1192.91,-1448.82 ; v2(1448.82,-586.61) U16.41@1535.43,-586.61
  Mid-Layer 1 w7.87: v2(1007.87,-1590.55) 1007.87,-1027.56 v2(1448.82,-586.61)
F91: U10.91 U19.5 | length 2824
  Top Layer, Top w7.87: U10.91@1192.91,-1468.5 1194.88,-1466.54 1230.31,-1466.54 1267.09,-1429.76 v2(1271.65,-1429.76)
  Mid-Layer 1 w7.87: v2(1271.65,-1429.76) 1298.9,-1457.01 1354.46,-1457.01 1445.33,-1366.14 1794.26,-1366.14 1917.79,-1489.68 1944.31,-1489.68 1996.66,-1437.32 2208.67,-1437.32 2264.42,-1381.57 2339.46,-1381.57 2413.27,-1455.39 2497.67,-1455.39 2818.9,-1776.61 2818.9,-2232.28 2992.13,-2405.51 3099.21,-2405.51 U19.5@3145.67,-2359.06
F98: U10.98 U19.4 | length 2678
  Top Layer, Top w7.87: U10.98@1192.91,-1606.3 1237.11,-1606.3 1252.5,-1621.69 1294.81,-1621.69 1306.27,-1610.24 v2(1314.96,-1610.24)
  Mid-Layer 1 w7.87: v2(1314.96,-1610.24) 1840.51,-1610.24 1916.03,-1534.72 2119.76,-1534.72 2201.41,-1453.07 2215.19,-1453.07 2270.94,-1397.32 2332.94,-1397.32 2406.75,-1471.13 2491.15,-1471.13 2803.15,-1783.14 2803.15,-2271.65 2990.55,-2459.06 U19.4@3045.67,-2459.06
F99: U10.99 U19.3 | length 2944.4
  Top Layer, Top w7.87: U10.99@1192.91,-1625.98 1234.53,-1625.98 1249.17,-1640.63 1294.7,-1640.63 1315.49,-1661.42 v2(1318.9,-1661.42)
  Mid-Layer 1 w7.87: v2(1318.9,-1661.42) 1544.19,-1661.42 1572.14,-1689.37 2122.93,-1689.37 2187.57,-1624.72 2187.57,-1489.18 2207.94,-1468.82 2238.16,-1468.82 2293.91,-1413.07 2326.41,-1413.07 2400.23,-1486.88 2484.62,-1486.88 2787.4,-1789.66 2787.4,-2303.15 2988.58,-2504.33 3100.39,-2504.33 U19.3@3145.67,-2459.06
F100: U8.15 U10.100 | length 846.1
  Top Layer, Top w9.06: U8.15@1187.01,-2330.72 1185.04,-2328.75 1185.04,-2251.97 1153.54,-2220.47 1153.54,-2015.75 1035.43,-1897.64 1035.43,-1809.6 1036.34,-1808.7 1036.34,-1781.85 1035.43,-1780.95 1035.43,-1748.03 1137.8,-1645.67 U10.100@1192.91,-1645.67
F101: U8.14 U10.101 | length 569.2
  Top Layer, Top w9.06: U8.14@1187.01,-2102.36 1188.98,-2100.39 1188.98,-2023.62 1062.99,-1897.64 1062.99,-1751.97 1149.61,-1665.35 U10.101@1192.91,-1665.35
F103: U8.13 U10.103 | length 531.5
  Top Layer, Top w9.06: U10.103@1192.91,-1704.72 1134.18,-1704.72 1082.68,-1756.23 1082.68,-1889.76 1212.6,-2019.69 U8.13@1212.6,-2102.36
F104: U8.12 U10.104 | length 503.3
  Top Layer, Top w9.06: U10.104@1192.91,-1724.41 1141.73,-1724.41 1102.36,-1763.78 1102.36,-1881.89 1240.16,-2019.69 1240.16,-2100.39 U8.12@1238.19,-2102.36
F105: U8.11 U10.105 | length 473.8
  Top Layer, Top w9.06: U10.105@1192.91,-1744.09 1145.99,-1744.09 1122.05,-1768.04 1122.05,-1874.02 1263.78,-2015.75 U8.11@1263.78,-2102.36
F106: U8.10 U10.106 | length 445.6
  Top Layer, Top w9.06: U10.106@1192.91,-1763.78 1153.54,-1763.78 1141.73,-1775.59 1141.73,-1862.2 1291.34,-2011.81 1291.34,-2100.39 U8.10@1289.37,-2102.36
F110: U8.9 U10.110 | length 233
  Top Layer, Top w9.06: U10.110@1289.37,-1879.92 1289.37,-1985.9 1314.96,-2011.49 U8.9@1314.96,-2102.36
F111: U8.8 U10.111 | length 235.5
  Top Layer, Top w9.06: U10.111@1309.06,-1879.92 1309.06,-1978.35 1338.58,-2007.87 1338.58,-2100.39 U8.8@1340.55,-2102.36
F112: U8.7 U10.112 | length 237.9
  Top Layer, Top w9.06: U10.112@1328.74,-1879.92 1328.74,-1970.47 1366.14,-2007.87 U8.7@1366.14,-2102.36
F113: U8.6 U10.113 | length 240.4
  Top Layer, Top w9.06: U10.113@1348.43,-1879.92 1348.43,-1962.6 1389.76,-2003.94 1389.76,-2100.39 U8.6@1391.73,-2102.36
F114: U8.5 U10.114 | length 242.8
  Top Layer, Top w9.06: U10.114@1368.11,-1879.92 1368.11,-1954.72 1413.39,-2000 1413.39,-2098.43 U8.5@1417.32,-2102.36
F115: U8.4 U10.115 | length 245.3
  Top Layer, Top w9.06: U10.115@1387.8,-1879.92 1387.8,-1946.85 1440.94,-2000 1440.94,-2100.39 U8.4@1442.91,-2102.36
F119: U8.3 U10.119 | length 223.3
  Top Layer, Top w9.06: U10.119@1466.54,-1879.92 1466.54,-2100.39 U8.3@1468.5,-2102.36
F120: U8.2 U10.120 | length 227.3
  Top Layer, Top w9.06: U10.120@1486.22,-1879.92 1486.22,-2041.34 1496.06,-2051.18 1496.06,-2100.39 U8.2@1494.09,-2102.36
F121: U8.1 U10.121 | length 228.1
  Top Layer, Top w9.06: U10.121@1505.91,-1879.92 1505.91,-2025.59 1519.69,-2039.37 U8.1@1519.69,-2102.36
GND: B1.2 C1.2 C2.2 C3.1 C4.1 C5.1 C6.1 C7.1 C8.2 C9.1 C10.1 C11.1 C13.2 C14.2 C15.2 C16.2 C17.2 C18.2 C19.2 C20.2 C21.1 C22.2 C23.1 C24.2 C27.1 C28.1 C30.1 C31.1 C32.2 C36.1 C38.2 C39.2 C40.1 C41.1 C42.1 C43.1 C44.1 C45.1 C46.1 C47.1 C48.1 C49.1 C50.1 C51.2 C52.2 C53.1 C54.2 C55.2 C56.1 C57.1 C58.2 C59.1 C60.2 C61.2 C62.2 C63.2 C64.2 C65.2 C66.2 C67.2 C68.2 C69.2 C70.2 C71.2 C72.2 C73.2 C74.2 C75.2 C76.2 C77.2 C78.2 C79.2 C80.2 C81.1 C82.2 C83.1 C84.2 C85.2 C86.2 C87.2 C88.2 C89.1 C90.1 C91.2 C92.1 C93.1 C94.2 C95.2 C96.1 C97.1 C98.2 C99.2 C100.1 C104.1 C112.2 C113.2 C114.2 C115.2 C116.1 C117.1 C118.1 C119.2 C120.2 C121.2 C122.2 C123.1 C124.1 C125.2 C126.2 DEBUG_UART.3 J1.1 J2.1 J3.1 J4.2 J5.1 J6.26 J6.27 J6.28 J6.43 J6.44 J7.4 J7.6 J7.8 J7.10 J7.12 J7.14 J7.16 J7.18 J7.20 J8.5 J8.6 J8.7 J8.8 J8.9 J9.1 J10.1 JTAG_FPGA.2 JTAG_FPGA.10 MIС_IN2.1 PTT_IN.2 R1.1 R4.3 R5.1 R6.1 R12.1 R13.1 R14.1 R15.1 R16.1 R17.1 R22.2 R23.2 R27.1 R28.1 R38.1 R48.2 R49.2 R56.1 R57.2 T1.1 T2.2 T2.6 T2.8 T2.10 T3.6 T3.10 T4.6 T4.10 T6.4 T6.11 U1.2 U1.11 U1.15 U2.2 U3.4 U3.5 U3.8 U3.9 U4.11 U4.15 U4.22 U4.28 U5.10 U5.19 U5.26 U5.49 U5.74 U5.99 U6.1 U7.4 U8.16 U8.20 U8.26 U9.4 U10.2 U10.4 U10.19 U10.22 U10.27 U10.36 U10.41 U10.48 U10.57 U10.63 U10.74 U10.79 U10.82 U10.94 U10.95 U10.97 U10.108 U10.118 U10.123 U10.131 U10.140 U10.145 U11.1 U12.1 U13.1 U14.4 U15.4 U16.2 U16.4 U16.7 U16.10 U16.11 U16.14 U16.18 U16.31 U16.50 U16.61 U16.65 U17.4 U17.9 U17.12 U17.17 U18.1 U19.1 XG1.3 | length 11101.8
  Top Layer, Top w7.87: U16.50@1582.68,-751.97 U16.65@1582.68,-704.72 ; U16.65@1582.68,-448.82 U16.31@1582.68,-401.57 ; U16.65@1740.16,-606.3 U16.7@1885.83,-606.3 ; U16.65@1740.16,-547.24 U16.10@1885.83,-547.24 ; U16.65@1759.84,-527.56 U16.11@1885.83,-527.56 ; U16.61@1799.21,-751.97 1799.21,-665.35 U16.4@1885.83,-665.35 ; U16.65@1818.9,-468.5 U16.14@1885.83,-468.5 ; U16.65@1838.58,-704.72 U16.2@1885.83,-704.72 ; U16.65@1838.58,-448.82 U16.18@1838.58,-401.57 ; U17.9@2226.38,-631.89 2228.96,-629.31 2228.96,-601.75 v5(2255.91,-574.8) ; U17.4@2226.38,-517.72 2228.96,-520.3 2228.96,-547.85 v5(2255.91,-574.8) ; U17.12@2285.43,-631.89 2282.85,-629.31 2282.85,-601.75 v5(2255.91,-574.8) ; U5.19@4653.54,-925.2 4653.54,-1055.12 4665.35,-1066.93 4811.02,-1066.93 4849.75,-1028.2 ; U5.10@4830.71,-925.2 4832.3,-926.79 4832.3,-960.06 4839.93,-967.69 4841.71,-967.69 4858.27,-984.25 ; 4862.2,-992.13 4862.2,-1015.75 4849.75,-1028.2 ; v1(4948.82,-1066.93) v1@4958.66,-1076.77 ; U5.99@5074.8,-1011.81 5039.37,-1011.81 5019.69,-1031.5 5003.94,-1031.5 v1@4958.66,-1076.77 ; 4849.75,-1028.2 4908.16,-1086.61 4948.82,-1086.61 v1@4958.66,-1076.77
  Top Layer, Top w9.06: T6.4@307.09,-2870.08 351.57,-2825.59 T6.11@351.57,-2802.76 ; C11.1@323.15,-1122.24 322.57,-1121.68 322.57,-1067.81 504.47,-1067.81 U2.2@504.47,-1016 ; T3.10@888.58,-2590.16 888.58,-2612.99 T3.6@933.07,-2657.48 ; v1(952.76,-1401.57) 981.79,-1372.54 1088.09,-1372.54 1129.92,-1330.71 1129.92,-1307.09 1145.67,-1291.34 U10.82@1192.91,-1291.34 ; v1(964.57,-1744.09) 992.13,-1744.09 1149.61,-1586.61 U10.97@1192.91,-1586.61 ; C78.2@1157.48,-2496.06 C75.2@1299.21,-2496.06 ; U10.108@1192.91,-1803.15 1192.91,-1838.58 v1(1212.6,-1858.27) ; v1(1244.09,-2255.91) 1248.03,-2251.97 1307.09,-2251.97 1314.96,-2259.84 U8.20@1314.96,-2330.71 ; T2.8@1267.72,-2697.24 T2.2@1267.72,-2629.92 ; T2.10@1317.72,-2822.44 1317.72,-2845.28 T2.6@1362.2,-2889.76 ; v1(1437.65,-1573.13) 1470.75,-1606.23 1470.75,-1811.35 1446.85,-1835.25 U10.118@1446.85,-1879.92 ; U10.63@1446.85,-1037.4 1446.85,-1075.83 1391.76,-1130.93 1391.76,-1162.95 v1(1483.18,-1254.37) 1546.38,-1191.18 1546.38,-1096.48 1564.96,-1077.9 U10.57@1564.96,-1037.4 ; U8.26@1468.5,-2330.71 1468.5,-2283.46 1480.32,-2271.65 1562.99,-2271.65 1622.05,-2330.71 1720.47,-2330.71 C80.2@1724.41,-2326.77 ; v1(1728.57,-1649.02) 1733.78,-1643.82 1790.12,-1643.82 1887.66,-1741.35 1887.66,-1832.68 1879.92,-1840.42 U10.140@1879.92,-1879.92 ; U10.48@1742.13,-1037.4 1742.13,-1074.42 1698.04,-1118.5 1698.04,-1241.9 ; 1761.72,-1212 1727.94,-1212 1698.04,-1241.9 ; 1879.92,-1093.8 U10.41@1879.92,-1037.4 ; U10.19@2035.43,-1448.82 1987.85,-1448.82 1968.91,-1429.87 1968.91,-1389.76 U10.22@2035.43,-1389.76 ; U10.27@2035.43,-1291.34 2472.44,-1291.34 2578.74,-1397.64 v1(2748.03,-1397.64) ; v1(2295.21,-1641.85) 2358.85,-1641.85 U9.4@2361.44,-1639.27 ; J6.28@3451.18,-1587.4 J6.27@3551.18,-1587.4 ; v1(3968.5,-1555.12) 4039.37,-1484.25 4393.7,-1484.25 4433.07,-1444.88 U5.49@4468.5,-1444.88 ; C41.1@4976.38,-1728.35 5074.8,-1728.35 5114.17,-1688.98 5114.17,-1661.42 5051.18,-1598.43 4996.06,-1598.43 4988.19,-1590.55 U5.74@4988.19,-1531.5 ; C23.1@5535.43,-1566.93 5547.24,-1555.12 U4.11@5645.67,-1555.12 ; C31.1@5862.2,-1795.28 5861.45,-1796.03 5785.24,-1796.03 5785.24,-1532.96 5865.44,-1452.76 U4.22@5929.13,-1452.76 ; v1(5920.81,-1647.28) 5920.81,-1640.22 U4.15@5929.14,-1631.89 ; C28.1@6413.39,-1452.76 6484.25,-1452.76 R6.1@6486.22,-1450.79 ; 1698.04,-1241.9 v1(1683.04,-1256.91) 1698.04,-1241.9 ; C30.1@6393.7,-1763.78 6393.7,-1696.85 R5.1@6411.42,-1679.13 C27.1@6486.22,-1679.13 6468.5,-1696.85 R12.1@6468.5,-1763.78 C30.1@6393.7,-1763.78
  Top Layer, Top w15: U16.65@1582.68,-704.72 U16.65@1710.63,-576.77 ; U16.65@1582.68,-448.82 U16.65@1710.63,-576.77 ; U16.65@1838.58,-704.72 1799.21,-665.35 1740.16,-606.3 U16.65@1710.63,-576.77 ; U16.65@1838.58,-448.82 1818.9,-468.5 1759.84,-527.56 1740.16,-547.24 U16.65@1710.63,-576.77
  Bottom Layer, Bottom w9.06: R49.2@763.78,-2208.66 834.65,-2208.66 C93.1@838.58,-2212.6 C104.1@917.32,-2212.6 ; v3(1614.17,-1456.69) 1738.76,-1456.69 v1(1789.29,-1406.16) ; v1(3862.86,-253.35) 3872.9,-263.39 U7.4@3909.45,-263.39 ; PTT_IN.2@4041.04,-863.86 4041.04,-960.65 4096.13,-1015.75 C49.1@4350.39,-1015.75 ; J7.20@4139.37,-2413.39 J7.18@4239.37,-2413.39 J7.16@4339.37,-2413.39 J7.14@4439.37,-2413.39 J7.12@4539.37,-2413.39 J7.10@4639.37,-2413.39 J7.8@4739.37,-2413.39 J7.6@4839.37,-2413.39 J7.4@4939.37,-2413.39 ; J6.28@3451.18,-1587.4 J6.27@3551.18,-1587.4 J6.26@3451.18,-1487.4 J6.28@3451.18,-1587.4
  other v1: 6435.46,-2908.69 1791.34,-2854.33 3027.56,-2763.78 1051.18,-2688.98 1047.24,-2622.05 5649.34,-2562.02 1051.18,-2555.12 5004.24,-2534.91 1059.06,-2484.25 5862.2,-2437.01 1066.93,-2425.2 3803.7,-2402.78 637.8,-2338.58 6307.09,-2314.96 1070.87,-2311.02 2444.59,-2307.89 1988.19,-2303.15 1066.93,-2255.91 74.8,-2232.28 1070.87,-2169.29 6311.02,-2165.35 5496.06,-2149.61 4936.39,-2148.05 1070.87,-2106.3 6314.96,-2051.18 1070.87,-2043.31 5500,-2007.87 1070.86,-1988.18 1035.43,-1952.76 5692.91,-1933.07 5909.45,-1933.07 2089.46,-1910.64 5767.72,-1870.08 3133.28,-1834.23 1003.94,-1795.28 129.92,-1755.91 200.79,-1755.91 267.72,-1755.91 366.14,-1755.91 429.13,-1755.91 531.5,-1755.91 618.11,-1755.91 681.1,-1755.91 728.35,-1755.91 787.4,-1755.91 846.46,-1755.91 921.26,-1755.91 6636.97,-1750.93 1574.25,-1646.49 287.4,-1637.8 5538.76,-1626.65 862.2,-1515.75 1440.17,-1416.28 6419.91,-1342.27 4862.2,-1311.02 6773.63,-1061.67 3940.94,-972.44 986.03,-877.78 5752.48,-691.48 4088.98,-573.11 1157.48,-456.69 3673.23,-437.01 6903.34,-323.74 5090.55,-232.28 5397.26,-213.76 5637.8,-208.66 362.2,-169.29 1698.42,-162.61 3039.72,-162.61
  other v2: 1637.8,-696.85 1712.6,-696.85 1586.61,-645.67 1712.6,-645.67 1582.68,-574.8 1633.86,-574.8 1783.46,-574.8 1834.65,-574.8 1586.61,-507.87 1712.6,-507.87 1637.8,-456.69 1712.6,-456.69 1783.46,-452.76
  other v3: 118.11,-2874.02 7244.09,-2874.02 4212.6,-905.51 118.11,-157.48 7244.09,-157.48
NetC29_2: C29.2 C30.2 J2.2 MIС_IN2.2 R11.1 R12.2 | length 1096.5
  Top Layer, Top w9.06: R11.1@6188.98,-1818.9 6248.03,-1877.95 C29.2@6287.4,-1877.95 6354.33,-1877.95 C30.2@6393.7,-1838.58 R12.2@6468.5,-1838.58 6610.24,-1838.58 6680.6,-1908.94 MIС_IN2.2@6680.6,-1978.08 6680.6,-2050.68 6901.57,-2271.65 J2.2@6982.28,-2271.65
NetC112_1: C112.1 C113.1 C114.1 C115.1 C117.2 C118.2 C120.1 L7.2 U16.1 U16.5 U16.6 U16.15 U16.16 U16.17 U16.32 U16.49 U16.62 U17.1 U17.3 U17.10 | length 3617.9
  Top Layer, Top w7.87: v2(1488.19,-409.45) 1492.13,-405.51 1561.17,-405.51 1562.99,-403.69 U16.32@1562.99,-401.57 ; v2(1562.99,-799.21) U16.49@1562.99,-751.97 ; 1818.9,-782.65 U16.62@1818.9,-751.97 ; U16.17@1858.27,-401.57 1858.27,-393.79 1860.09,-391.97 1891.49,-391.97 v2@1891.73,-391.73 ; U16.1@1885.83,-724.41 1885.83,-791.34 v2(1937.01,-842.52) ; U16.6@1885.83,-625.98 U16.5@1885.83,-645.67 1971.62,-645.67 1983.43,-657.48 v2(1992.13,-657.48) ; U16.15@1885.83,-448.82 U16.16@1885.83,-429.13 1889.91,-429.13 1891.73,-427.32 v2@1891.73,-391.73 ; v2(1897.64,-385.83) v2@1891.73,-391.73 ; v2(2192.91,-653.54) 2209.48,-653.54 2217.35,-661.42 2233.31,-661.42 2243.11,-651.62 2243.11,-648.17 2246.06,-645.22 U17.10@2246.06,-631.89 ; v2(2192.91,-488.19) 2233.31,-488.19 2243.11,-497.99 2243.11,-501.44 2246.06,-504.39 U17.3@2246.06,-517.72 ; U17.1@2285.43,-517.72 2285.43,-509.28 2286.34,-508.37 2326.28,-508.37 v2(2326.77,-507.87)
  Mid-Layer 1 w7.87: v2(1992.13,-657.48) v2@1998.03,-651.57 ; 2196.85,-511.81 v2@2196.85,-500
  Mid-Layer 1 w19.68: v2(1488.19,-409.45) 1514.59,-409.45 ; v2(1562.99,-799.21) 1514.59,-750.81 1514.59,-409.45 ; v2(1811.02,-802.74) 1811.43,-803.15 1897.64,-803.15 ; v2(1937.01,-842.52) 1897.64,-803.15 ; v2(1992.13,-657.48) 1897.64,-562.99 ; v2(2192.91,-488.19) 2090.55,-385.83 v2(1897.64,-385.83) ; v2@2196.85,-641.73 2196.85,-511.81 ; v2@2207.01,-502.28 2315.68,-502.28 2321.27,-507.87 v2(2326.77,-507.87) ; 1514.59,-409.45 1874.02,-409.45 v2(1897.64,-385.83) ; 1897.64,-803.15 1897.64,-562.99 ; 1897.64,-562.99 v2(1897.64,-385.83)
  Bottom Layer, Bottom w7.87: C114.1@1476.38,-795.28 C114.1@1480.32,-799.21 ; C113.1@1484.25,-338.58 C113.1@1488.19,-342.52 ; C112.1@1937.01,-777.57 C112.1@1938.99,-775.59 ; C118.2@2149.61,-454.74 C118.2@2153.54,-454.74 ; C120.1@2157.48,-718.52 2157.48,-681.1 ; v2(2326.77,-507.87) v2@2326.77,-501.98 ; C117.2@2377.95,-450.8 C117.2@2381.89,-450.8
  Bottom Layer, Bottom w19.68: L7.2@1273.62,-338.58 1370.08,-338.58 C113.1@1484.25,-338.58 ; C114.1@1480.32,-799.21 v2(1562.99,-799.21) ; v2(1488.19,-409.45) C113.1@1488.19,-342.52 ; v2(1897.64,-385.83) C115.1@1897.64,-301.17 ; v2(1937.01,-842.52) C112.1@1937.01,-777.57 ; C118.2@2153.54,-454.74 2183.11,-484.3 2183.53,-484.3 2187,-487.77 v2@2187,-488.19 ; 2157.48,-681.1 2185.03,-653.54 v2(2192.91,-653.54) ; v2@2326.77,-501.98 C117.2@2377.95,-450.8
NetC121_1: C121.1 R67.1 U17.2 | length 511.6
  Top Layer, Top w7.87: R67.1@2155.51,-759.84 2234.24,-759.84 C121.1@2236.22,-761.82 2238.18,-763.78 v2(2299.21,-763.78) ; U17.2@2265.75,-517.72 2266.12,-517.34 2266.12,-466.16 v2(2267.72,-464.57)
  Mid-Layer 2 w7.87: v2(2267.72,-464.57) 2267.72,-523.62 2299.21,-555.12 v2(2299.21,-763.78)
NetC122_1: C122.1 R67.2 U16.3 | length 225.9
  Top Layer, Top w7.87: U16.3@1885.83,-685.04 1927.15,-685.04 2000,-757.89 C122.1@2003.94,-757.89 2005.89,-759.84 R67.2@2080.71,-759.84
NetC124_2: C124.2 C126.1 L8.1 U18.2 U18.4 | length 829.6
  Bottom Layer, Bottom w7.87: C126.1@944.88,-602.36 C126.1@950.79,-596.46
  Bottom Layer, Bottom w19.68: U18.4@652.02,-370.08 U18.2@652.02,-598.43 652.02,-675.64 685.04,-708.66 732.44,-708.66 806.41,-708.66 832.52,-682.55 832.52,-612.36 842.52,-602.36 909.45,-602.36 C126.1@944.88,-602.36 ; C126.1@950.79,-596.46 L8.1@1074.8,-596.46
  other v2: 562.99,-480.31 665.35,-480.31 783.46,-480.31 562.99,-346.46 673.23,-346.46 779.53,-346.46 562.99,-236.22 673.23,-236.22 787.4,-232.28
NetL7_1: L7.1 L8.2 | length 93.3
  Bottom Layer, Bottom w7.87: L7.1@1165.35,-340.55 L7.1@1167.32,-338.58
  Bottom Layer, Bottom w19.68: L8.2@1074.8,-340.55 L7.1@1165.35,-340.55
NetR66_1: R66.1 U17.11 | length 1336
  Top Layer, Top w7.87: R66.1@1322.83,-624.02 1326.77,-624.02 1348.43,-602.36 1348.43,-576.77 v2(1437.01,-488.19) ; v2(2263.78,-704.72) 2265.37,-703.13 2265.37,-632.27 U17.11@2265.75,-631.89
  Mid-Layer 2 w7.87: v2(1437.01,-488.19) 1472.44,-488.19 1622.05,-338.58 1895.38,-338.58 2161.1,-604.3 2161.1,-666.72 2199.11,-704.72 v2(2263.78,-704.72)
NetR68_1: R68.1 U17.5 | length 118.9
  Top Layer, Top w7.87: R68.1@2080.71,-547.24 2082.68,-545.28 U17.5@2198.82,-545.28
NetR68_2: R68.2 U16.9 | length 136.1
  Top Layer, Top w7.87: U16.9@1885.83,-566.93 1992.13,-566.93 2011.81,-547.24 R68.2@2013.78,-547.24